# Altium PCB PCB_v1.PcbDoc (part 1 of 2)
Units mil, origin at the board's own origin, x right, y up, seen from the top; angles counter-clockwise.
Board outline 3011.81 x 2441 mil, 3 copper layers (Top Layer, Internal Plane 13, Bottom Layer); 107 components, 61 nets, 342 pads, 602 vias.
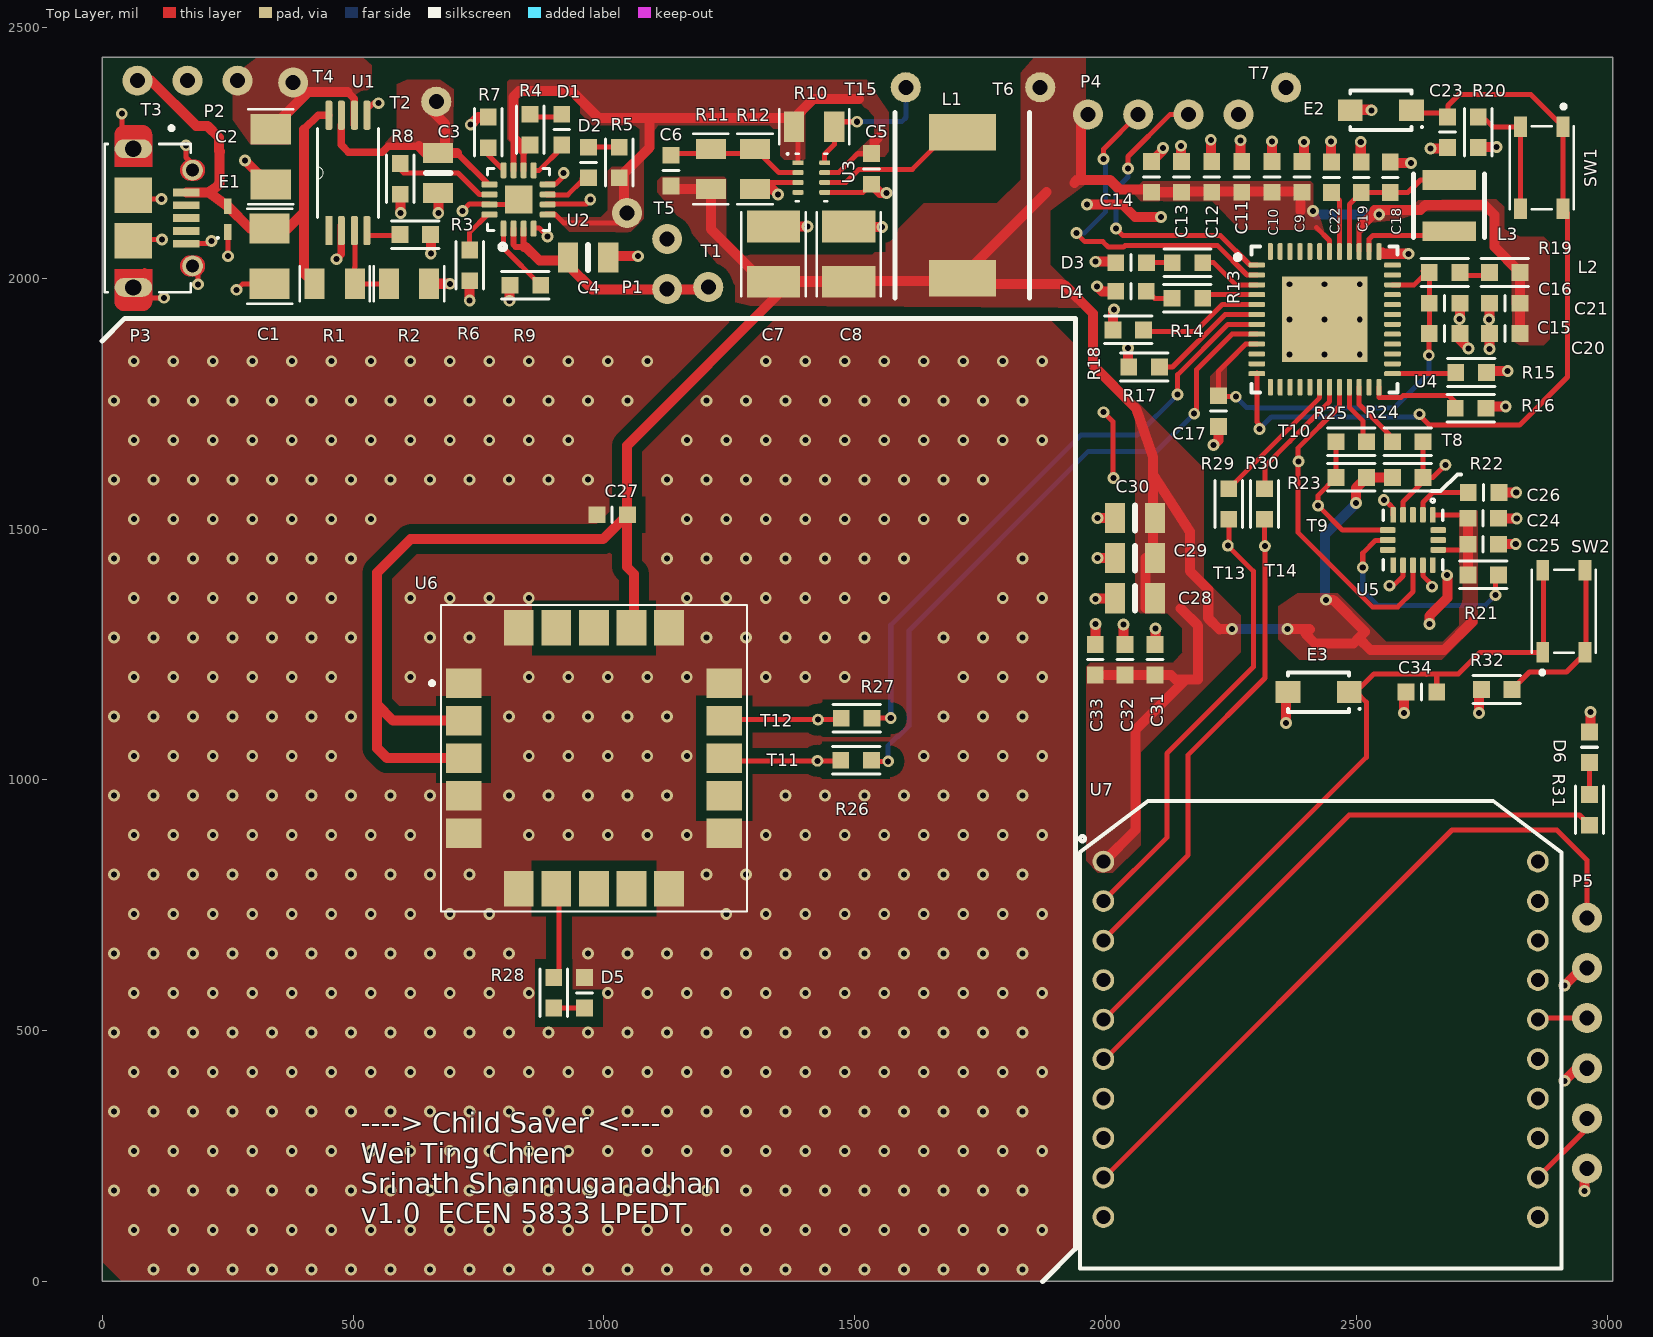
[diagram p0: Top Layer view]
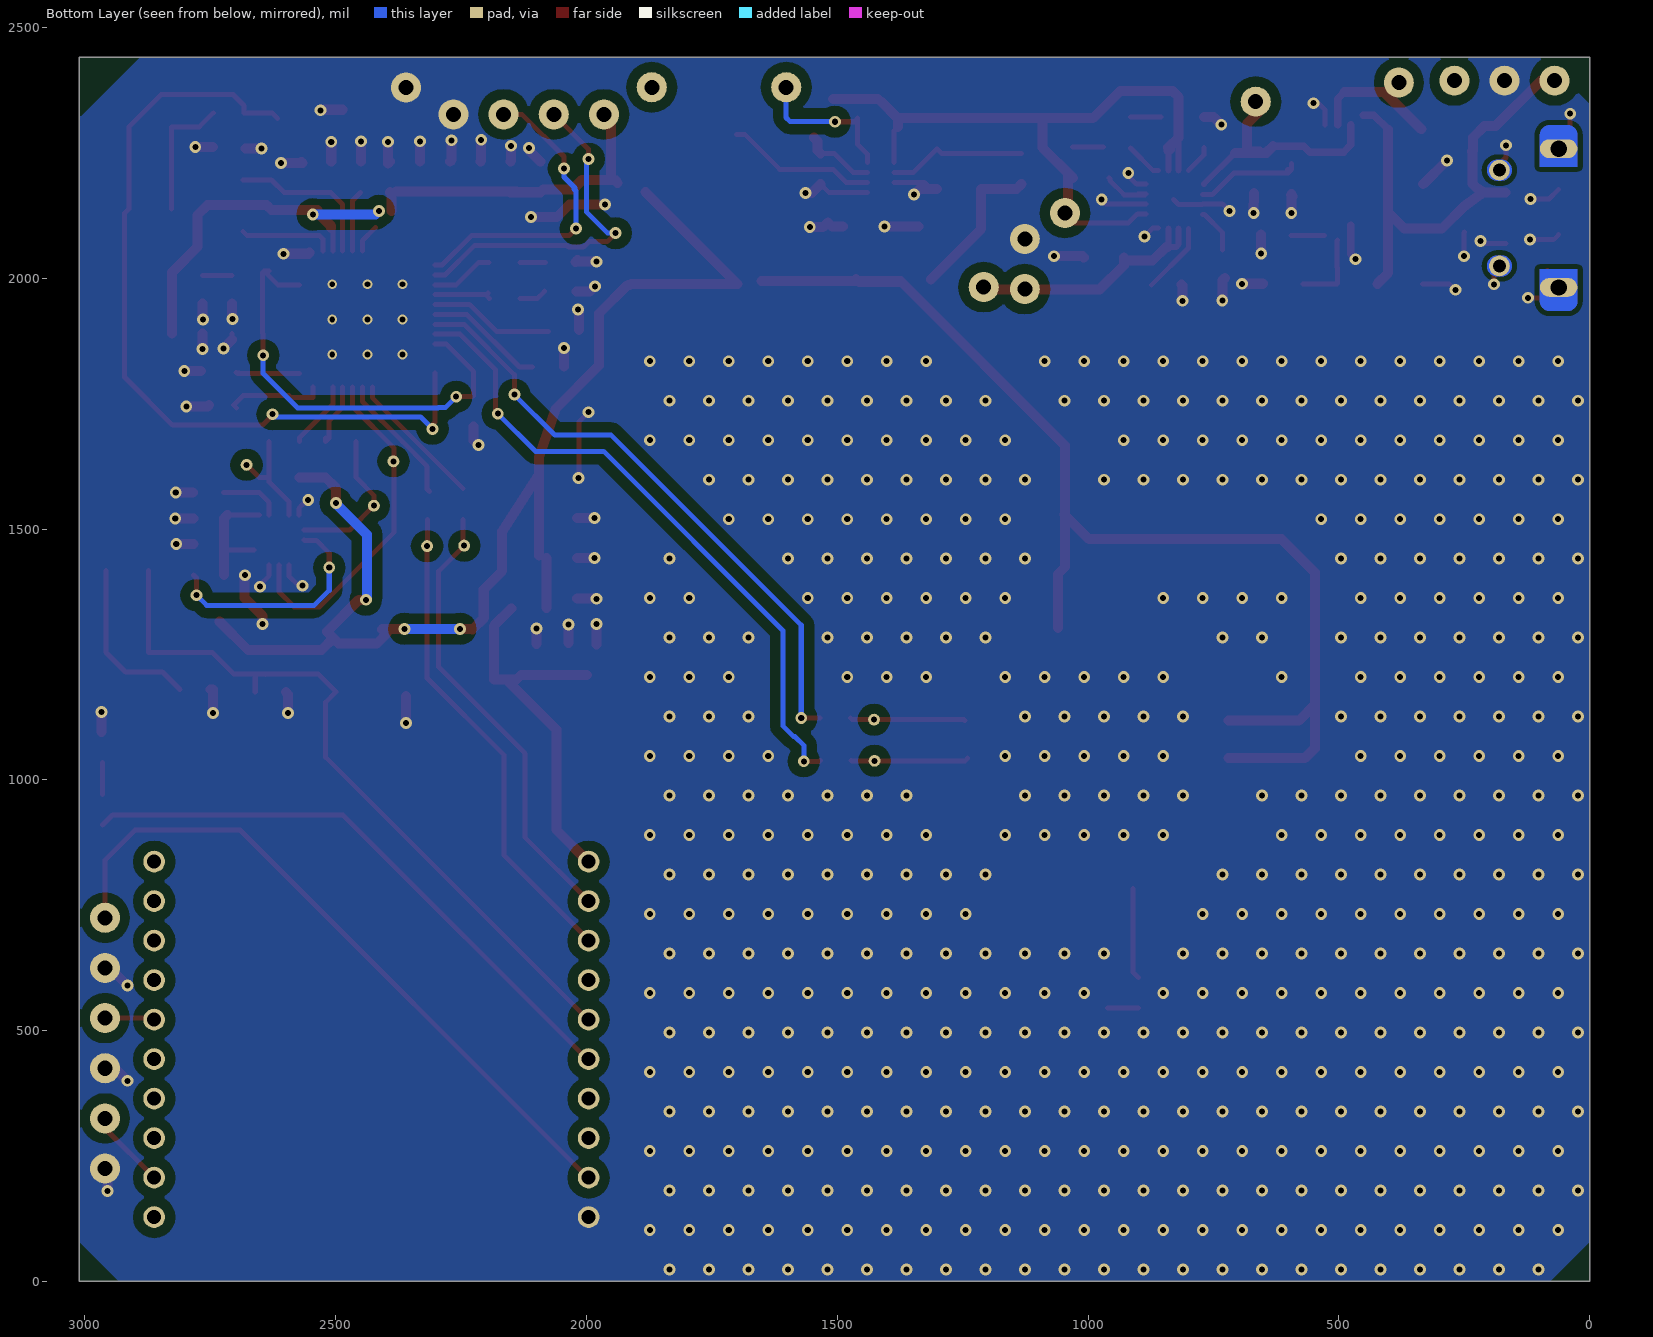
[diagram p1: Bottom Layer view, seen from below]
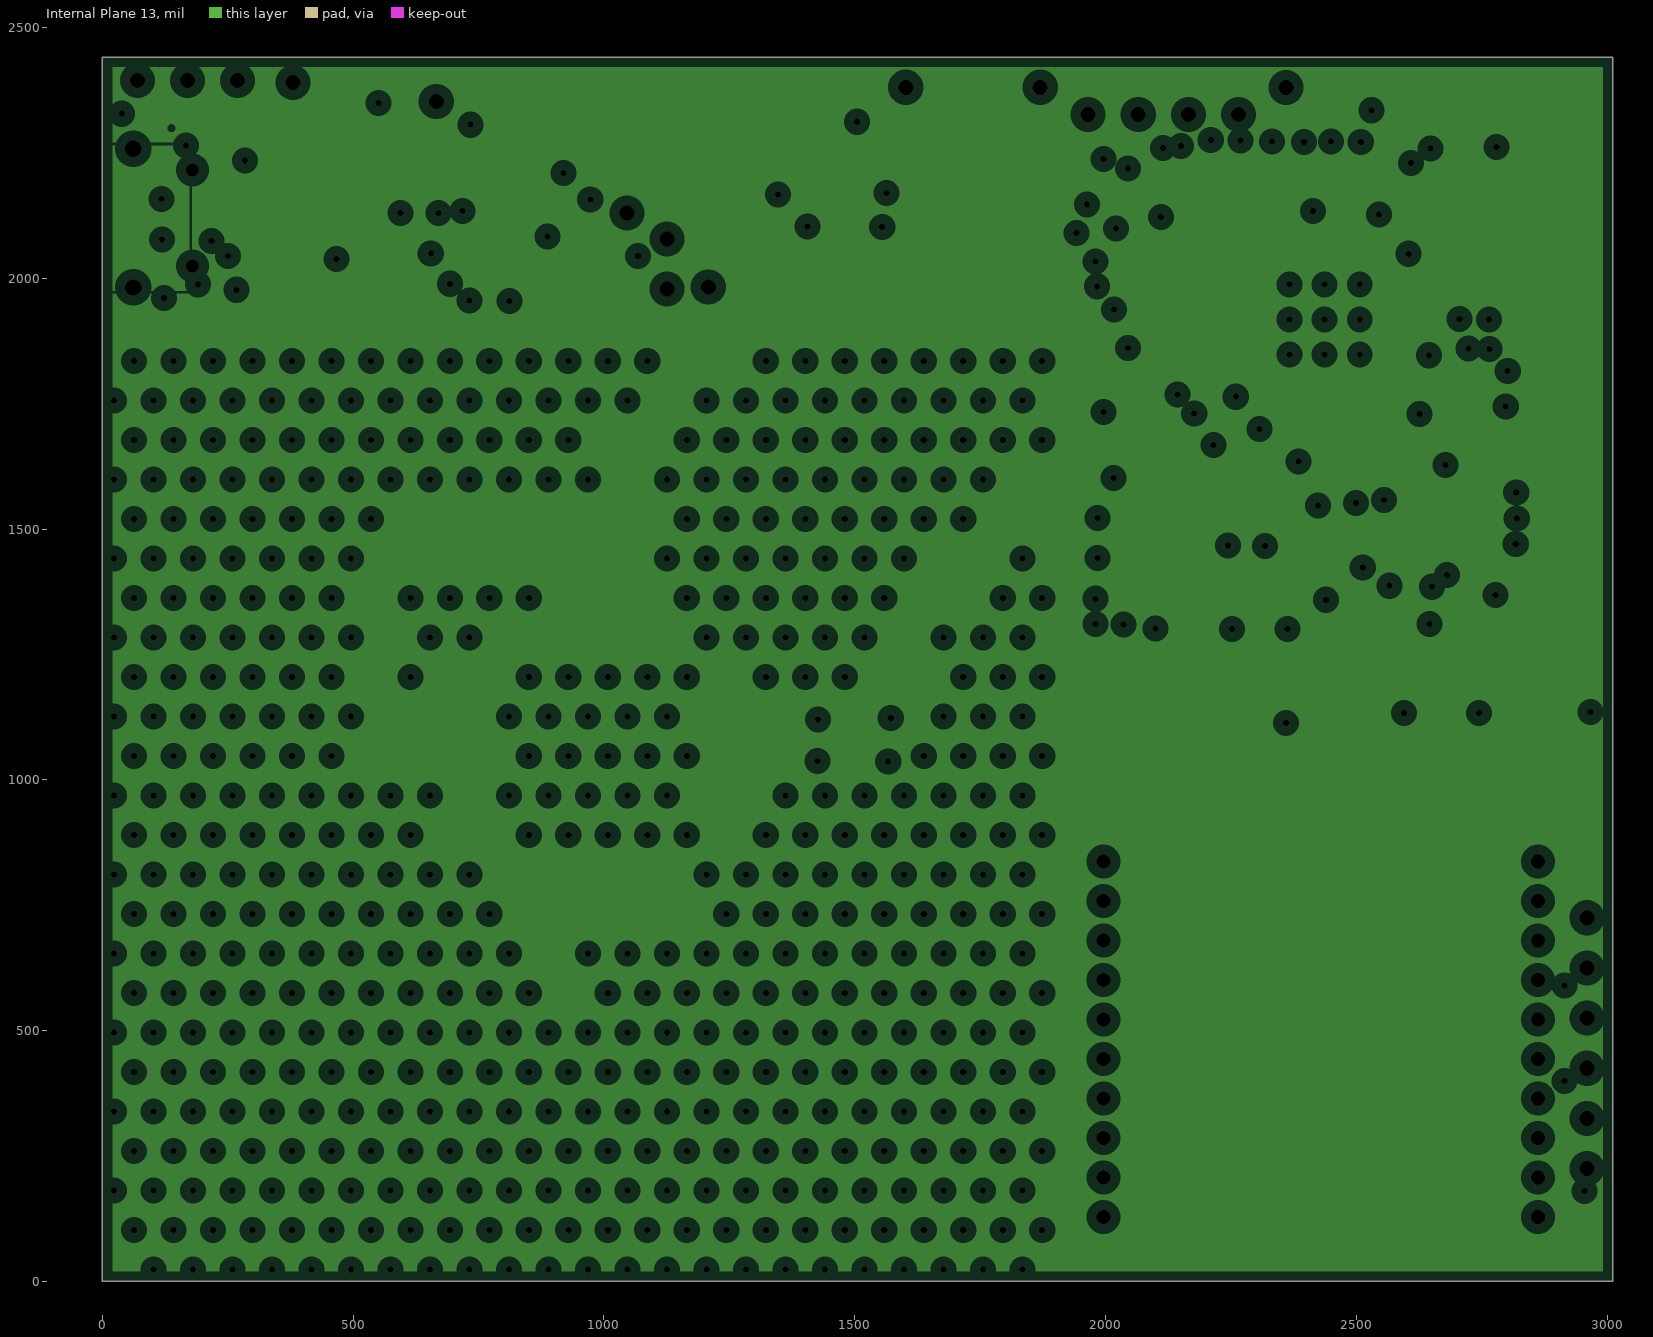
[diagram p2: Internal Plane 13, clearances drawn from the general rule]
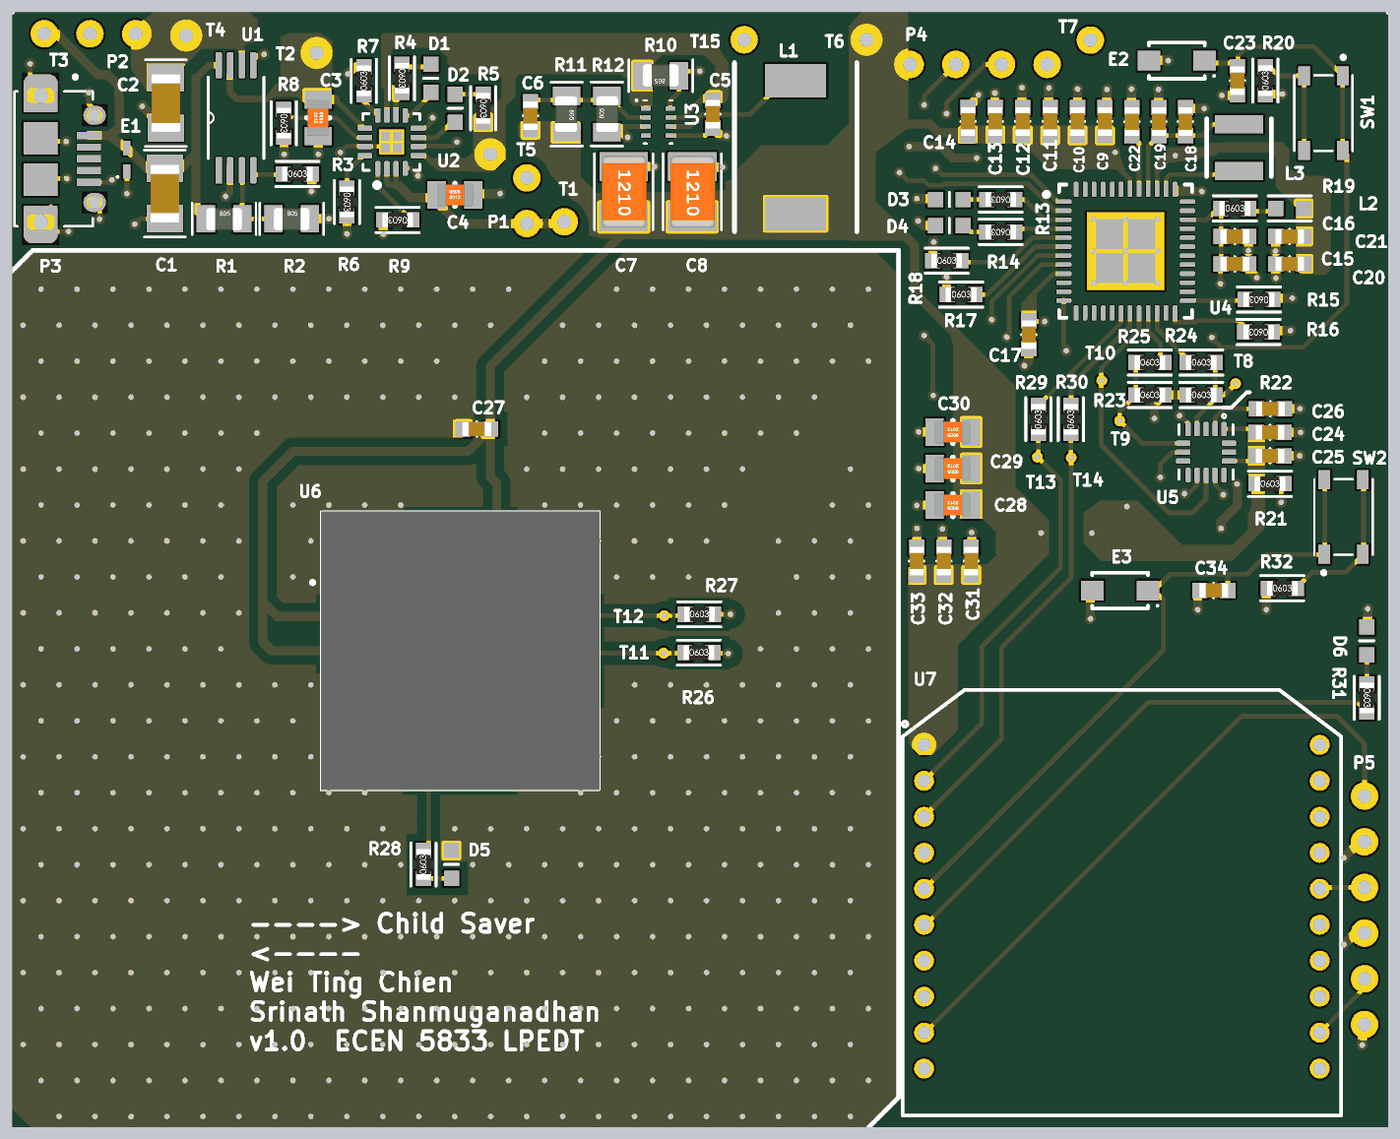
[diagram p4: 3D render of the assembled board from above, using the file's embedded part models]

## Layer stack, top to bottom
Top Solder: solder mask 0.4, Solder Resist, Dk 3.5
Top Layer: signal copper 1.4
Dielectric 1: dielectric 12.6, FR-4, Dk 4.8
Internal Plane 13: plane copper 1.4
Dielectric2: dielectric 12.6, FR-4, Dk 4.8
Bottom Layer: signal copper 1.4
Bottom Solder: solder mask 0.4, Solder Resist, Dk 3.5

## Board outline
0,0 3011.81,0 3011.81,2441 0,2441

## Design rules (kind name [scope] priority, off if disabled: settings)
Clearance [All] p1: gap=10 ignorepadtopadclearanceinfootprint=FALSE except(0: Arc-Hole Track-Hole SMDPad-Hole THPad-Hole Via-Hole Fill-Hole Poly-Hole Region-Hole Text-Hole; 6: Track-Track Track-SMDPad SMDPad-SMDPad; 7: Arc-Text Track-Text SMDPad-Text THPad-Text Via-Text Fill-Text Poly-Text Region-Text Text-Text; 8: Arc-SMDPad; 20: Arc-Via Arc-Poly Track-Via Track-Poly SMDPad-Poly THPad-Via THPad-Poly Via-Via Via-Poly Fill-Poly Poly-Poly)
MinimumSolderMaskSliver [All] p1: minsoldermaskwidth=4
PlaneClearance [All] p1: clearance=20
PlaneConnect [All] p1: planeconnectstyle=Direct reliefexpansion=20 reliefentries=4 reliefconductorwidth=10 reliefairgap=10
PolygonConnect [All] p1: connectstyle=Direct reliefconductorwidth=10 reliefentries=4 polygonreliefangle="90 Angle" airgapwidth=10
RoutingVias [All] p1: holewidth=11.81 width=23.62 viastyle="Through Hole" minholewidth=11.81 minwidth=23.62 maxholewidth=19.68 maxwidth=78.74
SilkToSolderMaskClearance [IsPad] p1: minsilkscreentomaskgap=6 clearancetoexposedcopper=TRUE
SolderMaskExpansion [All] p1: expansion=5
Width POW_Width [(InNet('3.3V') OR InNet('GND') OR InNet('V_USB') OR InNet('V_SOLAR') OR InNet('V_PMU') OR InNet('V_BUCK_IN') OR InNet('V_BAT'))] p1: maxlimit=20 minlimit=6 preferedwidth=20
Width [All] p2: maxlimit=12 minlimit=8 preferedwidth=10
26 further rules are at their usual default settings.

## Classes and differential pairs
component class MCU: C9 C10 C11 C12 C13 C14 C15 C16 C17 C18 C19 C20 C21 C22 C23 D3 D4 E2 L2 L3 P4 R13 R14 R15 R16 R17 R18 R19 R20 SW1 U4
component class "LTE module": C28 C29 C30 C31 C32 C33 C34 D6 E3 P5 R29 R30 R31 R32 SW2 T13 T14 U7
component class "GPS module": C27 D5 R26 R27 R28 T11 T12 U6
component class Accelerometer: C24 C25 C26 R21 R22 R23 R24 R25 T8 T9 T10 U5
component class "Power circuit": C1 C2 C3 C4 C5 C6 C7 C8 D1 D2 E1 L1 P1 P2 P3 R1 R2 R3 R4 R5 R6 R7 R8 R9 R10 R11 R12 T1 T2 T3 T4 T5 T6 T7 T15 U1 U2 U3

## Components (designator, comment, footprint, x,y, rotation, side; value= is the part's Value field where it differs from the comment)
C1 "1206C 100NF" 1206-CAP 333.82,2044 r180 top value=100nF
C2 "1206C 100NF" 1206-CAP 335.95,2242.09 r180 top value=100nF
C3 "0805C 10UF" 0805-CAP 669.61,2210 r180 top value=10uF
C4 "0805C 10UF" 0805-CAP 968.83,2041.31 r270 top value=10uF
C5 "0603C 4U7F" 0603-CAP 1533.39,2218 r180 top value=4.7uF
C6 "0603C 120PF" 0603-CAP 1134.18,2214.54 r0 top value=120pF
C7 "1210C 22UF" 1210-CAP 1338.42,2048 r270 top value=22uF
C8 "1210C 22UF" 1210-CAP 1488.42,2048 r270 top value=22uF
C9 "0603C 10UF" 0603-CAP 2391.85,2201.97 r180 top value=10uF
C10 "0603C 1UF" 0603-CAP 2331.85,2201.97 r180 top value=1uF
C11 "0603C 10NF" 0603-CAP 2271.85,2201.97 r180 top value=10nF
C12 "0603C 10NF" 0603-CAP 2211.85,2201.97 r180 top value=10nF
C13 "0603C 10NF" 0603-CAP 2151.85,2201.97 r180 top value=10nF
C14 "0603C 10NF" 0603-CAP 2091.85,2201.97 r180 top value=10nF
C15 "0603C 10UF" 0603-CAP 2676.1,1890.12 r90 top value=10uF
C16 "0603C 10NF" 0603-CAP 2676.1,1950.12 r90 top value=10nF
C17 "0603C 10NF" 0603-CAP 2225.16,1735.24 r0 top value=10nF
C18 "0603C 100NF" 0603-CAP 2567.91,2201.34 r180 top value=100nF
C19 "0603C 4U7F" 0603-CAP 2509.84,2201.34 r180 top value=4.7uF
C20 "0603C 1UF" 0603-CAP 2796.1,1890.12 r270 top value=1uF
C21 "0603C 10UF" 0603-CAP 2796.1,1950.12 r270 top value=10uF
C22 "0603C 1UF" 0603-CAP 2450.79,2201.34 r180 top value=1uF
C23 "0603C 100NF" 0603-CAP 2681.79,2291.21 r0 top value=100nF
C24 "0603C 100NF" 0603-CAP 2753.15,1521.36 r90 top value=100nF
C25 "0603C 4U7F" 0603-CAP 2753.15,1469.89 r90 top value=4.7uF
C26 "0603C 100NF" 0603-CAP 2753.94,1572.83 r90 top value=100nF
C27 "0603C 4U7F" 0603-CAP 1016.73,1528.54 r270 top value=4.7uF
C28 "47uF" 0805-CAP 2059,1362 r90 top
C29 "47uF" 0805-CAP 2059,1442 r90 top
C30 "47uF" 0805-CAP 2059,1522 r90 top
C31 "0603C 10UF" 0603-CAP 2099.06,1239.52 r180 top value=10uF
C32 "0603C 10NF" 0603-CAP 2039.06,1239.52 r180 top value=10nF
C33 "0603C 68PF" 0603-CAP 1979.56,1239.52 r180 top value=68pF
C34 "0603C 100NF" 0603-CAP 2630,1175 r270 top value=100nF
D1 "LEDR" 0603-LED 915.98,2296.25 r0 top
D2 "LEDG" 0603-LED 969.46,2230.76 r0 top
D3 "0603 LEDG" 0603-LED 2051.15,2031.09 r270 top value=LEDG
D4 "LEDR" 0603-LED 2051,1974 r270 top
D5 "0603 LEDG" 0603-LED 961.3,575.4 r180 top value=LEDG
D6 "0603 LEDG" 0603-LED 2965,1065 r180 top value=LEDG
E1 "ESD_USB" ESD_USB 250.21,2118 r90 top
E2 "ESD_RS" ESD_RS 2549.12,2334.9 r180 top
E3 "ESD_RS" ESD_RS 2425,1175 r180 top
L1 "Inductor 470NH" "Inductor 470NH" 1714.77,2145.67 r270 top value=470nH
L2 "Ferrite Bead" 0603-FerritBead 2796.26,2011.42 r270 top value="1kR 200mA"
L3 "Inductor 4U7H" "Inductor 4U7H" 2685.29,2144.69 r90 top value=4.7uH
P1 "2pins_connector" 2_PINS_2.54 1186.31,1648.32 r90 top
P2 "2pins_connector" 2_PINS_2.54 600,2453.89 r180 top
P3 "ZX62D-B-5P8" *HRS_ZX62D-B-5P8_ZX62D-B-5P8(PRIMARY) 65,2120 r270 top value="MicroUSB Connector"
P4 "SWO" 4_PINS_2.54 1635.35,2266.77 r0 top
P5 "6pins_connector" 6_PINS_2.54 2735,1080 r270 top
R1 "0805R 5K1R" 0805-RES 463.53,1988.98 r270 top value=5.1k
R2 "0805R 5K1R" 0805-RES 611.54,1988.98 r270 top value=5.1k
R3 "0603R 1KR" 0603-RES 624,2087 r270 top value=1kR
R4 "0603R 1K5R" 0603-RES 853,2296.25 r180 top value=1.5k
R5 "0603R 1K5R" 0603-RES 1030.76,2230.76 r180 top value=1.5k
R6 "0603R 1KR" 0603-RES 732.61,2025.56 r180 top value=1k
R7 "0603R 1K07R" 0603-RES 769.46,2290.76 r0 top value=1.07k
R8 "0603R 46K4R" 0603-RES 594.26,2198 r180 top value=46.4k
R9 "0603R 10KR" 0603-RES 843.57,1986.19 r90 top value=10k
R10 "0805R 100KR" 0805-RES 1419.41,2301.96 r90 top value=100k
R11 "0805R 453KR" 0805-RES 1213.39,2218 r180 top value=453k
R12 "0805R 100KR" 0805-RES 1301.4,2218 r0 top value=100k
R13 "3KR" 0603-RES 2163.65,2031.09 r90 top value=3k
R14 "3KR" 0603-RES 2163.5,1959.97 r90 top value=3k
R15 "0603R NC" 0603-RES 2729,1812.13 r90 top value=NC
R16 "0603R NC" 0603-RES 2728,1741 r90 top value=NC
R17 "0603R NC" 0603-RES 2077,1822.97 r270 top value=NC
R18 "0603R NC" 0603-RES 2045.49,1897 r270 top value=NC
R19 "0603R 1R" 0603-RES 2676.18,2011.42 r270 top value=1
R20 "0603R 100R" 0603-RES 2743.09,2291.21 r0 top value=100R
R21 "0603R 10KR" 0603-RES 2753.15,1408.58 r270 top value=10k
R22 "0603R 10KR" 0603-RES 2602.64,1602.97 r270 top value=10k
R23 "0603R 10KR" 0603-RES 2490.14,1602.97 r270 top value=10k
R24 "0603R 1R" 0603-RES 2602.64,1674.09 r270 top value=1
R25 "0603R 1R" 0603-RES 2490.14,1674.09 r270 top value=1
R26 "0603R 47R" 0603-RES 1503,1039 r270 top value=47
R27 "0603R 47R" 0603-RES 1504.02,1123 r270 top value=47
R28 "0603R 1K5R" 0603-RES 900,575.4 r0 top value=1.5k
R29 "0603R 1R" 0603-RES 2246,1550 r0 top value=1
R30 "0603R 1R" 0603-RES 2317.13,1550 r0 top value=1
R31 "0603R 1K5R" 0603-RES 2965,940 r180 top value=1.5k
R32 "0603R 100R" 0603-RES 2780,1180 r270 top value=100R
SW1 "PTS810" *SW_PTS810_SJM_250_SMTR_LFS 2870.08,2220.19 r270 top
SW2 "PTS810" *SW_PTS810_SJM_250_SMTR_LFS 2914.07,1336 r90 top
T1 "1pin_header" 1_PIN_2.54 878.25,1922.25 r0 top
T2 "1pin_header" 1_PIN_2.54 726,2022 r90 top
T3 "1pin_header" 1_PIN_2.54 130,2063.89 r90 top
T4 "1pin_header" 1_PIN_2.54 440.68,2060 r90 top
T5 "1pin_header" 1_PIN_2.54 716.3,2070 r0 top
T6 "1pin_header" 1_PIN_2.54 1540,2320.72 r0 top
T7 "1pin_header" 1_PIN_2.54 2420,2050 r90 top
T8 "1pin_test" 1_PIN_test 2617.89,1958 r270 top
T9 "1pin_test" 1_PIN_test 2364,1876.59 r270 top
T10 "1pin_test" 1_PIN_test 2325,1965 r270 top
T11 "" 1_PIN_test 1095.93,978 r0 top
T12 "" 1_PIN_test 1486.96,790 r90 top
T13 "" 1_PIN_test 2304,1137 r90 top
T14 "" 1_PIN_test 2378,1136 r90 top
T15 "" 1_PIN_2.54 1662,2050.72 r90 top
U1 "TPS2111APW" *SOP65P640X120-8N 489.69,2210 r90 top
U2 "BQ24079TRGTR" *QFN50P300X300X100-17N 830,2157 r90 top
U3 "TPS62822" SON50P150X100_HS-9N 1413.71,2200.79 r0 top
U4 "EFM32PG12_power" QFN50P700X700X90_HS-49N_ 2437.01,1918 r0 top
U5 "MMA8452Q" *QFN-16_0.5MM 2613.15,1478.12 r270 top
U6 "SAM-M8Q-0-10" SAMM8Q010 980.32,1043.11 r0 top
U7 "XB3-C-A1-UT-001" XB24CAPIT-001 2428.99,857.73 r0 top

## Footprints (in the part's own frame and the unit in brackets; to place one, negate y for a bottom-side part, rotate by r counter-clockwise, add the part's x,y. Pads: shape width x height; smd on the part's side, far side on the other; paste and mask are expansions set on the pad)
1_PIN_2.54 [mil]
  round 60 hole 30: 1(330,60)
1_PIN_test [mm]
  round 0.6 hole 0.3: 1(8.382,1.524)
2_PINS_2.54 [mil]
  round 60 hole 30: 1(330,60) 2(430,60)
4_PINS_2.54 [mil]
  round 60 hole 30: 1(330,60) 2(430,60) 3(530,60) 4(630,60)
6_PINS_2.54 [mil]
  round 60 hole 30: 1(355,225) 2(455,225) 3(555,225) 4(655,225) 5(755,225) 6(855,225)
0603-CAP [mm]
  rect 0.85x0.85 smd: 1(0,0.775) 2(0,-0.775)
  silkscreen extent -0.4,0 0.4,0, body extent -0.4,-0.8 0.4,0.8, height 0.9
0603-FerritBead [mm]
  rect 0.85x0.85 smd: 1(0,0.775) 2(0,-0.775)
  silkscreen extent -0.7,-1.2 0.7,1.2, body extent -0.4,-0.85 0.4,0.85, height 1
0603-LED [mm]
  rect 0.85x0.85 smd: 1(0,0.775) 2(0,-0.775)
  silkscreen extent -0.4,0 0.4,0, body extent -0.4,-0.8 0.4,0.8, height 1.1
0603-RES [mm]
  rect 0.85x0.85 smd: 1(0,0.775) 2(0,-0.775)
  silkscreen extent -0.7,-1.2 0.7,1.2, body extent -0.4,-0.85 0.4,0.85, height 0.56
0805-CAP [mil]
  rect 60x40 smd: 1(0,40) 2(0,-40)
  silkscreen extent -25,0 25,0, body extent -25,-39 25,39, height 35
0805-RES [mil]
  rect 60x40 smd: 1(0,40) 2(0,-40)
  silkscreen extent -35,-70 35,70, body extent -24,-39 26,39, height 31
1206-CAP [mil]
  rect 80x60 smd mask+2: 1(0,55) 2(0,-55)
  silkscreen extent -45,-95 45,95, body extent -31,-63 32,63, height 39
1210-CAP [mm]
  rect 1.6x2.7 smd: 1(-1.4,0) 2(1.4,0)
  silkscreen extent -2.12,-1.63 2.12,1.63, body extent -2,-1.22 2,1.27, height 1.7
*HRS_ZX62D-B-5P8_ZX62D-B-5P8(PRIMARY) [mm]
  rect 0.4x1.35 smd mask+0.051: 1(-1.3,2.6) 2(-0.65,2.6) 3(0,2.6) 4(0.65,2.6) 5(1.3,2.6)
  round 1.05 hole 0.65: S1(-2.425,2.925) S2(2.425,2.925)
  oval 0.95x1.9 hole 0.825: S3(-3.512,-0.075) S6(3.512,-0.075)
  rect 1.8x1.9 smd: S4(-1.15,-0.075) S5(1.15,-0.075)
  Top Layer region: 3.1,-0.075 2.6,-0.075 2.6,0.875 4.2,0.875 4.226,0.874 4.252,0.872 4.278,0.869 4.304,0.864 4.329,0.858 4.355,0.851 4.379,0.842 4.403,0.832 4.427,0.821 4.45,0.808 4.472,0.794 4.494,0.78 4.515,0.764 4.535,0.747 4.554,0.729 4.572,0.71 4.589,0.69 4.605,0.669 4.619,0.647 4.633,0.625 4.645,0.602 4.657,0.578 4.667,0.554 4.676,0.53 4.683,0.504 4.689,0.479 4.694,0.453 4.697,0.427 4.699,0.401 4.7,0.375 4.7,-0.075 3.925,-0.075 3.925,0.4 3.925,0.414 3.923,0.429 3.922,0.443 3.919,0.457 3.916,0.471 3.912,0.485 3.907,0.499 3.901,0.512 3.895,0.525 3.888,0.537 3.881,0.55 3.872,0.562 3.864,0.573 3.854,0.584 3.844,0.594 3.834,0.604 3.823,0.614 3.812,0.622 3.8,0.631 3.788,0.638 3.775,0.645 3.762,0.651 3.749,0.657 3.735,0.662 3.721,0.666 3.707,0.669 3.693,0.672 3.679,0.673 3.664,0.675 3.65,0.675 3.4,0.675 3.384,0.675 3.369,0.673 3.353,0.671 3.338,0.668 3.322,0.665 3.307,0.66 3.292,0.655 3.278,0.649 3.264,0.642 3.25,0.635 3.237,0.627 3.224,0.618 3.211,0.608 3.199,0.598 3.188,0.587 3.177,0.576 3.167,0.564 3.157,0.551 3.148,0.538 3.14,0.525 3.133,0.511 3.126,0.497 3.12,0.483 3.115,0.468 3.11,0.453 3.107,0.437 3.104,0.422 3.102,0.406 3.1,0.391 3.1,0.375 3.1,-0.075
  Top Layer region: -3.1,-0.075 -2.6,-0.075 -2.6,-1.025 -4.2,-1.025 -4.226,-1.024 -4.252,-1.022 -4.278,-1.019 -4.304,-1.014 -4.329,-1.008 -4.355,-1.001 -4.379,-0.992 -4.403,-0.982 -4.427,-0.971 -4.45,-0.958 -4.472,-0.944 -4.494,-0.93 -4.515,-0.914 -4.535,-0.897 -4.554,-0.879 -4.572,-0.86 -4.589,-0.84 -4.605,-0.819 -4.619,-0.797 -4.633,-0.775 -4.645,-0.752 -4.657,-0.728 -4.667,-0.704 -4.676,-0.68 -4.683,-0.654 -4.689,-0.629 -4.694,-0.603 -4.697,-0.577 -4.699,-0.551 -4.7,-0.525 -4.7,-0.075 -3.925,-0.075 -3.925,-0.55 -3.925,-0.564 -3.923,-0.579 -3.922,-0.593 -3.919,-0.607 -3.916,-0.621 -3.912,-0.635 -3.907,-0.649 -3.901,-0.662 -3.895,-0.675 -3.888,-0.687 -3.881,-0.7 -3.872,-0.712 -3.864,-0.723 -3.854,-0.734 -3.844,-0.744 -3.834,-0.754 -3.823,-0.764 -3.812,-0.772 -3.8,-0.781 -3.788,-0.788 -3.775,-0.795 -3.762,-0.801 -3.749,-0.807 -3.735,-0.812 -3.721,-0.816 -3.707,-0.819 -3.693,-0.822 -3.679,-0.823 -3.664,-0.825 -3.65,-0.825 -3.4,-0.825 -3.384,-0.825 -3.369,-0.823 -3.353,-0.821 -3.338,-0.818 -3.322,-0.815 -3.307,-0.81 -3.292,-0.805 -3.278,-0.799 -3.264,-0.792 -3.25,-0.785 -3.237,-0.777 -3.224,-0.768 -3.211,-0.758 -3.199,-0.748 -3.188,-0.737 -3.177,-0.726 -3.167,-0.714 -3.157,-0.701 -3.148,-0.688 -3.14,-0.675 -3.133,-0.661 -3.126,-0.647 -3.12,-0.633 -3.115,-0.618 -3.11,-0.603 -3.107,-0.587 -3.104,-0.572 -3.102,-0.556 -3.1,-0.541 -3.1,-0.525 -3.1,-0.075
  Top Layer region: 2.6,-1.025 4.2,-1.025 4.226,-1.024 4.252,-1.022 4.278,-1.019 4.304,-1.014 4.329,-1.008 4.355,-1.001 4.379,-0.992 4.403,-0.982 4.427,-0.971 4.45,-0.958 4.472,-0.944 4.494,-0.93 4.515,-0.914 4.535,-0.897 4.554,-0.879 4.572,-0.86 4.589,-0.84 4.605,-0.819 4.619,-0.797 4.633,-0.775 4.645,-0.752 4.657,-0.728 4.667,-0.704 4.676,-0.68 4.683,-0.654 4.689,-0.629 4.694,-0.603 4.697,-0.577 4.699,-0.551 4.7,-0.525 4.7,-0.075 3.925,-0.075 3.925,-0.525 3.925,-0.541 3.923,-0.556 3.921,-0.572 3.918,-0.587 3.915,-0.603 3.91,-0.618 3.905,-0.633 3.899,-0.647 3.892,-0.661 3.885,-0.675 3.877,-0.688 3.868,-0.701 3.858,-0.714 3.848,-0.726 3.837,-0.737 3.826,-0.748 3.814,-0.758 3.801,-0.768 3.788,-0.777 3.775,-0.785 3.761,-0.792 3.747,-0.799 3.733,-0.805 3.718,-0.81 3.703,-0.815 3.687,-0.818 3.672,-0.821 3.656,-0.823 3.641,-0.825 3.625,-0.825 3.4,-0.825 3.384,-0.825 3.369,-0.823 3.353,-0.821 3.338,-0.818 3.322,-0.815 3.307,-0.81 3.292,-0.805 3.278,-0.799 3.264,-0.792 3.25,-0.785 3.237,-0.777 3.224,-0.768 3.211,-0.758 3.199,-0.748 3.188,-0.737 3.177,-0.726 3.167,-0.714 3.157,-0.701 3.148,-0.688 3.14,-0.675 3.133,-0.661 3.126,-0.647 3.12,-0.633 3.115,-0.618 3.11,-0.603 3.107,-0.587 3.104,-0.572 3.102,-0.556 3.1,-0.541 3.1,-0.525 3.1,-0.075 2.6,-0.075 2.6,-1.025
  Top Layer region: -2.6,0.875 -4.2,0.875 -4.226,0.874 -4.252,0.872 -4.278,0.869 -4.304,0.864 -4.329,0.858 -4.355,0.851 -4.379,0.842 -4.403,0.832 -4.427,0.821 -4.45,0.808 -4.472,0.794 -4.494,0.78 -4.515,0.764 -4.535,0.747 -4.554,0.729 -4.572,0.71 -4.589,0.69 -4.605,0.669 -4.619,0.647 -4.633,0.625 -4.645,0.602 -4.657,0.578 -4.667,0.554 -4.676,0.53 -4.683,0.504 -4.689,0.479 -4.694,0.453 -4.697,0.427 -4.699,0.401 -4.7,0.375 -4.7,-0.075 -3.925,-0.075 -3.925,0.375 -3.925,0.391 -3.923,0.406 -3.921,0.422 -3.918,0.437 -3.915,0.453 -3.91,0.468 -3.905,0.483 -3.899,0.497 -3.892,0.511 -3.885,0.525 -3.877,0.538 -3.868,0.551 -3.858,0.564 -3.848,0.576 -3.837,0.587 -3.826,0.598 -3.814,0.608 -3.801,0.618 -3.788,0.627 -3.775,0.635 -3.761,0.642 -3.747,0.649 -3.733,0.655 -3.718,0.66 -3.703,0.665 -3.687,0.668 -3.672,0.671 -3.656,0.673 -3.641,0.675 -3.625,0.675 -3.4,0.675 -3.384,0.675 -3.369,0.673 -3.353,0.671 -3.338,0.668 -3.322,0.665 -3.307,0.66 -3.292,0.655 -3.278,0.649 -3.264,0.642 -3.25,0.635 -3.237,0.627 -3.224,0.618 -3.211,0.608 -3.199,0.598 -3.188,0.587 -3.177,0.576 -3.167,0.564 -3.157,0.551 -3.148,0.538 -3.14,0.525 -3.133,0.511 -3.126,0.497 -3.12,0.483 -3.115,0.468 -3.11,0.453 -3.107,0.437 -3.104,0.422 -3.102,0.406 -3.1,0.391 -3.1,0.375 -3.1,-0.075 -2.6,-0.075 -2.6,0.875
  Top Layer region: 2.425,2.5 2.425,2.3 2.398,2.301 2.37,2.303 2.343,2.306 2.316,2.311 2.289,2.318 2.263,2.326 2.237,2.335 2.211,2.345 2.187,2.357 2.163,2.37 2.139,2.385 2.116,2.4 2.095,2.417 2.074,2.435 2.054,2.454 2.035,2.474 2.017,2.495 2,2.516 1.985,2.539 1.97,2.562 1.957,2.587 1.945,2.611 1.935,2.637 1.926,2.663 1.918,2.689 1.911,2.716 1.906,2.743 1.903,2.77 1.901,2.798 1.9,2.825 1.9,3.025 1.901,3.052 1.903,3.08 1.906,3.107 1.911,3.134 1.918,3.161 1.926,3.187 1.935,3.213 1.945,3.239 1.957,3.263 1.97,3.287 1.985,3.311 2,3.334 2.017,3.355 2.035,3.376 2.054,3.396 2.074,3.415 2.095,3.433 2.116,3.45 2.139,3.465 2.163,3.48 2.187,3.493 2.211,3.505 2.237,3.515 2.263,3.524 2.289,3.532 2.316,3.539 2.343,3.544 2.37,3.547 2.398,3.549 2.425,3.55 2.425,3.35 2.408,3.35 2.391,3.348 2.374,3.346 2.357,3.343 2.341,3.339 2.325,3.334 2.309,3.328 2.293,3.322 2.277,3.315 2.262,3.306 2.248,3.298 2.234,3.288 2.22,3.278 2.208,3.267 2.195,3.255 2.183,3.242 2.172,3.23 2.162,3.216 2.152,3.202 2.144,3.187 2.135,3.173 2.128,3.157 2.122,3.141 2.116,3.125 2.111,3.109 2.107,3.093 2.104,3.076 2.102,3.059 2.1,3.042 2.1,3.025 2.1,2.825 2.1,2.808 2.102,2.791 2.104,2.774 2.107,2.757 2.111,2.741 2.116,2.725 2.122,2.709 2.128,2.693 2.135,2.677 2.144,2.662 2.152,2.648 2.162,2.634 2.172,2.62 2.183,2.608 2.195,2.595 2.208,2.583 2.22,2.572 2.234,2.562 2.248,2.552 2.262,2.544 2.277,2.535 2.293,2.528 2.309,2.522 2.325,2.516 2.341,2.511 2.357,2.507 2.374,2.504 2.391,2.502 2.408,2.5 2.425,2.5
  Top Layer region: 2.425,3.35 2.425,3.55 2.452,3.549 2.48,3.547 2.507,3.544 2.534,3.539 2.561,3.532 2.587,3.524 2.613,3.515 2.639,3.505 2.663,3.493 2.688,3.48 2.711,3.465 2.734,3.45 2.755,3.433 2.776,3.415 2.796,3.396 2.815,3.376 2.833,3.355 2.85,3.334 2.865,3.311 2.88,3.287 2.893,3.263 2.905,3.239 2.915,3.213 2.924,3.187 2.932,3.161 2.939,3.134 2.944,3.107 2.947,3.08 2.949,3.052 2.95,3.025 2.95,2.825 2.949,2.798 2.947,2.77 2.944,2.743 2.939,2.716 2.932,2.689 2.924,2.663 2.915,2.637 2.905,2.611 2.893,2.587 2.88,2.562 2.865,2.539 2.85,2.516 2.833,2.495 2.815,2.474 2.796,2.454 2.776,2.435 2.755,2.417 2.734,2.4 2.711,2.385 2.688,2.37 2.663,2.357 2.639,2.345 2.613,2.335 2.587,2.326 2.561,2.318 2.534,2.311 2.507,2.306 2.48,2.303 2.452,2.301 2.425,2.3 2.425,2.5 2.442,2.5 2.459,2.502 2.476,2.504 2.493,2.507 2.509,2.511 2.525,2.516 2.541,2.522 2.557,2.528 2.573,2.535 2.588,2.544 2.602,2.552 2.616,2.562 2.63,2.572 2.642,2.583 2.655,2.595 2.667,2.608 2.678,2.62 2.688,2.634 2.698,2.648 2.706,2.662 2.715,2.677 2.722,2.693 2.728,2.709 2.734,2.725 2.739,2.741 2.743,2.757 2.746,2.774 2.748,2.791 2.75,2.808 2.75,2.825 2.75,3.025 2.75,3.042 2.748,3.059 2.746,3.076 2.743,3.093 2.739,3.109 2.734,3.125 2.728,3.141 2.722,3.157 2.715,3.173 2.706,3.187 2.698,3.202 2.688,3.216 2.678,3.23 2.667,3.242 2.655,3.255 2.642,3.267 2.63,3.278 2.616,3.288 2.602,3.298 2.588,3.306 2.573,3.315 2.557,3.322 2.541,3.328 2.525,3.334 2.509,3.339 2.493,3.343 2.476,3.346 2.459,3.348 2.442,3.35 2.425,3.35
  Top Layer region: -2.425,2.5 -2.425,2.3 -2.452,2.301 -2.48,2.303 -2.507,2.306 -2.534,2.311 -2.561,2.318 -2.587,2.326 -2.613,2.335 -2.639,2.345 -2.663,2.357 -2.688,2.37 -2.711,2.385 -2.734,2.4 -2.755,2.417 -2.776,2.435 -2.796,2.454 -2.815,2.474 -2.833,2.495 -2.85,2.516 -2.865,2.539 -2.88,2.562 -2.893,2.587 -2.905,2.611 -2.915,2.637 -2.924,2.663 -2.932,2.689 -2.939,2.716 -2.944,2.743 -2.947,2.77 -2.949,2.798 -2.95,2.825 -2.95,3.025 -2.949,3.052 -2.947,3.08 -2.944,3.107 -2.939,3.134 -2.932,3.161 -2.924,3.187 -2.915,3.213 -2.905,3.239 -2.893,3.263 -2.88,3.287 -2.865,3.311 -2.85,3.334 -2.833,3.355 -2.815,3.376 -2.796,3.396 -2.776,3.415 -2.755,3.433 -2.734,3.45 -2.711,3.465 -2.688,3.48 -2.663,3.493 -2.639,3.505 -2.613,3.515 -2.587,3.524 -2.561,3.532 -2.534,3.539 -2.507,3.544 -2.48,3.547 -2.452,3.549 -2.425,3.55 -2.425,3.35 -2.442,3.35 -2.459,3.348 -2.476,3.346 -2.493,3.343 -2.509,3.339 -2.525,3.334 -2.541,3.328 -2.557,3.322 -2.573,3.315 -2.588,3.306 -2.602,3.298 -2.616,3.288 -2.63,3.278 -2.642,3.267 -2.655,3.255 -2.667,3.242 -2.678,3.23 -2.688,3.216 -2.698,3.202 -2.706,3.187 -2.715,3.173 -2.722,3.157 -2.728,3.141 -2.734,3.125 -2.739,3.109 -2.743,3.093 -2.746,3.076 -2.748,3.059 -2.75,3.042 -2.75,3.025 -2.75,2.825 -2.75,2.808 -2.748,2.791 -2.746,2.774 -2.743,2.757 -2.739,2.741 -2.734,2.725 -2.728,2.709 -2.722,2.693 -2.715,2.677 -2.706,2.662 -2.698,2.648 -2.688,2.634 -2.678,2.62 -2.667,2.608 -2.655,2.595 -2.642,2.583 -2.63,2.572 -2.616,2.562 -2.602,2.552 -2.588,2.544 -2.573,2.535 -2.557,2.528 -2.541,2.522 -2.525,2.516 -2.509,2.511 -2.493,2.507 -2.476,2.504 -2.459,2.502 -2.442,2.5 -2.425,2.5
  Top Layer region: -2.425,3.35 -2.425,3.55 -2.398,3.549 -2.37,3.547 -2.343,3.544 -2.316,3.539 -2.289,3.532 -2.263,3.524 -2.237,3.515 -2.211,3.505 -2.187,3.493 -2.163,3.48 -2.139,3.465 -2.116,3.45 -2.095,3.433 -2.074,3.415 -2.054,3.396 -2.035,3.376 -2.017,3.355 -2,3.334 -1.985,3.311 -1.97,3.287 -1.957,3.263 -1.945,3.239 -1.935,3.213 -1.926,3.187 -1.918,3.161 -1.911,3.134 -1.906,3.107 -1.903,3.08 -1.901,3.052 -1.9,3.025 -1.9,2.825 -1.901,2.798 -1.903,2.77 -1.906,2.743 -1.911,2.716 -1.918,2.689 -1.926,2.663 -1.935,2.637 -1.945,2.611 -1.957,2.587 -1.97,2.562 -1.985,2.539 -2,2.516 -2.017,2.495 -2.035,2.474 -2.054,2.454 -2.074,2.435 -2.095,2.417 -2.116,2.4 -2.139,2.385 -2.163,2.37 -2.187,2.357 -2.211,2.345 -2.237,2.335 -2.263,2.326 -2.289,2.318 -2.316,2.311 -2.343,2.306 -2.37,2.303 -2.398,2.301 -2.425,2.3 -2.425,2.5 -2.408,2.5 -2.391,2.502 -2.374,2.504 -2.357,2.507 -2.341,2.511 -2.325,2.516 -2.309,2.522 -2.293,2.528 -2.277,2.535 -2.262,2.544 -2.248,2.552 -2.234,2.562 -2.22,2.572 -2.208,2.583 -2.195,2.595 -2.183,2.608 -2.172,2.62 -2.162,2.634 -2.152,2.648 -2.144,2.662 -2.135,2.677 -2.128,2.693 -2.122,2.709 -2.116,2.725 -2.111,2.741 -2.107,2.757 -2.104,2.774 -2.102,2.791 -2.1,2.808 -2.1,2.825 -2.1,3.025 -2.1,3.042 -2.102,3.059 -2.104,3.076 -2.107,3.093 -2.111,3.109 -2.116,3.125 -2.122,3.141 -2.128,3.157 -2.135,3.173 -2.144,3.187 -2.152,3.202 -2.162,3.216 -2.172,3.23 -2.183,3.242 -2.195,3.255 -2.208,3.267 -2.22,3.278 -2.234,3.288 -2.248,3.298 -2.262,3.306 -2.277,3.315 -2.293,3.322 -2.309,3.328 -2.325,3.334 -2.341,3.339 -2.357,3.343 -2.374,3.346 -2.391,3.348 -2.408,3.35 -2.425,3.35
  Bottom Layer region: 3.1,-0.075 2.6,-0.075 2.6,0.875 4.2,0.875 4.226,0.874 4.252,0.872 4.278,0.869 4.304,0.864 4.329,0.858 4.355,0.851 4.379,0.842 4.403,0.832 4.427,0.821 4.45,0.808 4.472,0.794 4.494,0.78 4.515,0.764 4.535,0.747 4.554,0.729 4.572,0.71 4.589,0.69 4.605,0.669 4.619,0.647 4.633,0.625 4.645,0.602 4.657,0.578 4.667,0.554 4.676,0.53 4.683,0.504 4.689,0.479 4.694,0.453 4.697,0.427 4.699,0.401 4.7,0.375 4.7,-0.075 3.925,-0.075 3.925,0.4 3.925,0.414 3.923,0.429 3.922,0.443 3.919,0.457 3.916,0.471 3.912,0.485 3.907,0.499 3.901,0.512 3.895,0.525 3.888,0.537 3.881,0.55 3.872,0.562 3.864,0.573 3.854,0.584 3.844,0.594 3.834,0.604 3.823,0.614 3.812,0.622 3.8,0.631 3.788,0.638 3.775,0.645 3.762,0.651 3.749,0.657 3.735,0.662 3.721,0.666 3.707,0.669 3.693,0.672 3.679,0.673 3.664,0.675 3.65,0.675 3.4,0.675 3.384,0.675 3.369,0.673 3.353,0.671 3.338,0.668 3.322,0.665 3.307,0.66 3.292,0.655 3.278,0.649 3.264,0.642 3.25,0.635 3.237,0.627 3.224,0.618 3.211,0.608 3.199,0.598 3.188,0.587 3.177,0.576 3.167,0.564 3.157,0.551 3.148,0.538 3.14,0.525 3.133,0.511 3.126,0.497 3.12,0.483 3.115,0.468 3.11,0.453 3.107,0.437 3.104,0.422 3.102,0.406 3.1,0.391 3.1,0.375 3.1,-0.075
  Bottom Layer region: -3.1,-0.075 -2.6,-0.075 -2.6,-1.025 -4.2,-1.025 -4.226,-1.024 -4.252,-1.022 -4.278,-1.019 -4.304,-1.014 -4.329,-1.008 -4.355,-1.001 -4.379,-0.992 -4.403,-0.982 -4.427,-0.971 -4.45,-0.958 -4.472,-0.944 -4.494,-0.93 -4.515,-0.914 -4.535,-0.897 -4.554,-0.879 -4.572,-0.86 -4.589,-0.84 -4.605,-0.819 -4.619,-0.797 -4.633,-0.775 -4.645,-0.752 -4.657,-0.728 -4.667,-0.704 -4.676,-0.68 -4.683,-0.654 -4.689,-0.629 -4.694,-0.603 -4.697,-0.577 -4.699,-0.551 -4.7,-0.525 -4.7,-0.075 -3.925,-0.075 -3.925,-0.55 -3.925,-0.564 -3.923,-0.579 -3.922,-0.593 -3.919,-0.607 -3.916,-0.621 -3.912,-0.635 -3.907,-0.649 -3.901,-0.662 -3.895,-0.675 -3.888,-0.687 -3.881,-0.7 -3.872,-0.712 -3.864,-0.723 -3.854,-0.734 -3.844,-0.744 -3.834,-0.754 -3.823,-0.764 -3.812,-0.772 -3.8,-0.781 -3.788,-0.788 -3.775,-0.795 -3.762,-0.801 -3.749,-0.807 -3.735,-0.812 -3.721,-0.816 -3.707,-0.819 -3.693,-0.822 -3.679,-0.823 -3.664,-0.825 -3.65,-0.825 -3.4,-0.825 -3.384,-0.825 -3.369,-0.823 -3.353,-0.821 -3.338,-0.818 -3.322,-0.815 -3.307,-0.81 -3.292,-0.805 -3.278,-0.799 -3.264,-0.792 -3.25,-0.785 -3.237,-0.777 -3.224,-0.768 -3.211,-0.758 -3.199,-0.748 -3.188,-0.737 -3.177,-0.726 -3.167,-0.714 -3.157,-0.701 -3.148,-0.688 -3.14,-0.675 -3.133,-0.661 -3.126,-0.647 -3.12,-0.633 -3.115,-0.618 -3.11,-0.603 -3.107,-0.587 -3.104,-0.572 -3.102,-0.556 -3.1,-0.541 -3.1,-0.525 -3.1,-0.075
  Bottom Layer region: 2.6,-1.025 4.2,-1.025 4.226,-1.024 4.252,-1.022 4.278,-1.019 4.304,-1.014 4.329,-1.008 4.355,-1.001 4.379,-0.992 4.403,-0.982 4.427,-0.971 4.45,-0.958 4.472,-0.944 4.494,-0.93 4.515,-0.914 4.535,-0.897 4.554,-0.879 4.572,-0.86 4.589,-0.84 4.605,-0.819 4.619,-0.797 4.633,-0.775 4.645,-0.752 4.657,-0.728 4.667,-0.704 4.676,-0.68 4.683,-0.654 4.689,-0.629 4.694,-0.603 4.697,-0.577 4.699,-0.551 4.7,-0.525 4.7,-0.075 3.925,-0.075 3.925,-0.525 3.925,-0.541 3.923,-0.556 3.921,-0.572 3.918,-0.587 3.915,-0.603 3.91,-0.618 3.905,-0.633 3.899,-0.647 3.892,-0.661 3.885,-0.675 3.877,-0.688 3.868,-0.701 3.858,-0.714 3.848,-0.726 3.837,-0.737 3.826,-0.748 3.814,-0.758 3.801,-0.768 3.788,-0.777 3.775,-0.785 3.761,-0.792 3.747,-0.799 3.733,-0.805 3.718,-0.81 3.703,-0.815 3.687,-0.818 3.672,-0.821 3.656,-0.823 3.641,-0.825 3.625,-0.825 3.4,-0.825 3.384,-0.825 3.369,-0.823 3.353,-0.821 3.338,-0.818 3.322,-0.815 3.307,-0.81 3.292,-0.805 3.278,-0.799 3.264,-0.792 3.25,-0.785 3.237,-0.777 3.224,-0.768 3.211,-0.758 3.199,-0.748 3.188,-0.737 3.177,-0.726 3.167,-0.714 3.157,-0.701 3.148,-0.688 3.14,-0.675 3.133,-0.661 3.126,-0.647 3.12,-0.633 3.115,-0.618 3.11,-0.603 3.107,-0.587 3.104,-0.572 3.102,-0.556 3.1,-0.541 3.1,-0.525 3.1,-0.075 2.6,-0.075 2.6,-1.025
  Bottom Layer region: -2.6,0.875 -4.2,0.875 -4.226,0.874 -4.252,0.872 -4.278,0.869 -4.304,0.864 -4.329,0.858 -4.355,0.851 -4.379,0.842 -4.403,0.832 -4.427,0.821 -4.45,0.808 -4.472,0.794 -4.494,0.78 -4.515,0.764 -4.535,0.747 -4.554,0.729 -4.572,0.71 -4.589,0.69 -4.605,0.669 -4.619,0.647 -4.633,0.625 -4.645,0.602 -4.657,0.578 -4.667,0.554 -4.676,0.53 -4.683,0.504 -4.689,0.479 -4.694,0.453 -4.697,0.427 -4.699,0.401 -4.7,0.375 -4.7,-0.075 -3.925,-0.075 -3.925,0.375 -3.925,0.391 -3.923,0.406 -3.921,0.422 -3.918,0.437 -3.915,0.453 -3.91,0.468 -3.905,0.483 -3.899,0.497 -3.892,0.511 -3.885,0.525 -3.877,0.538 -3.868,0.551 -3.858,0.564 -3.848,0.576 -3.837,0.587 -3.826,0.598 -3.814,0.608 -3.801,0.618 -3.788,0.627 -3.775,0.635 -3.761,0.642 -3.747,0.649 -3.733,0.655 -3.718,0.66 -3.703,0.665 -3.687,0.668 -3.672,0.671 -3.656,0.673 -3.641,0.675 -3.625,0.675 -3.4,0.675 -3.384,0.675 -3.369,0.673 -3.353,0.671 -3.338,0.668 -3.322,0.665 -3.307,0.66 -3.292,0.655 -3.278,0.649 -3.264,0.642 -3.25,0.635 -3.237,0.627 -3.224,0.618 -3.211,0.608 -3.199,0.598 -3.188,0.587 -3.177,0.576 -3.167,0.564 -3.157,0.551 -3.148,0.538 -3.14,0.525 -3.133,0.511 -3.126,0.497 -3.12,0.483 -3.115,0.468 -3.11,0.453 -3.107,0.437 -3.104,0.422 -3.102,0.406 -3.1,0.391 -3.1,0.375 -3.1,-0.075 -2.6,-0.075 -2.6,0.875
  Bottom Layer region: 2.425,2.5 2.425,2.3 2.398,2.301 2.37,2.303 2.343,2.306 2.316,2.311 2.289,2.318 2.263,2.326 2.237,2.335 2.211,2.345 2.187,2.357 2.163,2.37 2.139,2.385 2.116,2.4 2.095,2.417 2.074,2.435 2.054,2.454 2.035,2.474 2.017,2.495 2,2.516 1.985,2.539 1.97,2.562 1.957,2.587 1.945,2.611 1.935,2.637 1.926,2.663 1.918,2.689 1.911,2.716 1.906,2.743 1.903,2.77 1.901,2.798 1.9,2.825 1.9,3.025 1.901,3.052 1.903,3.08 1.906,3.107 1.911,3.134 1.918,3.161 1.926,3.187 1.935,3.213 1.945,3.239 1.957,3.263 1.97,3.287 1.985,3.311 2,3.334 2.017,3.355 2.035,3.376 2.054,3.396 2.074,3.415 2.095,3.433 2.116,3.45 2.139,3.465 2.163,3.48 2.187,3.493 2.211,3.505 2.237,3.515 2.263,3.524 2.289,3.532 2.316,3.539 2.343,3.544 2.37,3.547 2.398,3.549 2.425,3.55 2.425,3.35 2.408,3.35 2.391,3.348 2.374,3.346 2.357,3.343 2.341,3.339 2.325,3.334 2.309,3.328 2.293,3.322 2.277,3.315 2.262,3.306 2.248,3.298 2.234,3.288 2.22,3.278 2.208,3.267 2.195,3.255 2.183,3.242 2.172,3.23 2.162,3.216 2.152,3.202 2.144,3.187 2.135,3.173 2.128,3.157 2.122,3.141 2.116,3.125 2.111,3.109 2.107,3.093 2.104,3.076 2.102,3.059 2.1,3.042 2.1,3.025 2.1,2.825 2.1,2.808 2.102,2.791 2.104,2.774 2.107,2.757 2.111,2.741 2.116,2.725 2.122,2.709 2.128,2.693 2.135,2.677 2.144,2.662 2.152,2.648 2.162,2.634 2.172,2.62 2.183,2.608 2.195,2.595 2.208,2.583 2.22,2.572 2.234,2.562 2.248,2.552 2.262,2.544 2.277,2.535 2.293,2.528 2.309,2.522 2.325,2.516 2.341,2.511 2.357,2.507 2.374,2.504 2.391,2.502 2.408,2.5 2.425,2.5
  Bottom Layer region: 2.425,3.35 2.425,3.55 2.452,3.549 2.48,3.547 2.507,3.544 2.534,3.539 2.561,3.532 2.587,3.524 2.613,3.515 2.639,3.505 2.663,3.493 2.688,3.48 2.711,3.465 2.734,3.45 2.755,3.433 2.776,3.415 2.796,3.396 2.815,3.376 2.833,3.355 2.85,3.334 2.865,3.311 2.88,3.287 2.893,3.263 2.905,3.239 2.915,3.213 2.924,3.187 2.932,3.161 2.939,3.134 2.944,3.107 2.947,3.08 2.949,3.052 2.95,3.025 2.95,2.825 2.949,2.798 2.947,2.77 2.944,2.743 2.939,2.716 2.932,2.689 2.924,2.663 2.915,2.637 2.905,2.611 2.893,2.587 2.88,2.562 2.865,2.539 2.85,2.516 2.833,2.495 2.815,2.474 2.796,2.454 2.776,2.435 2.755,2.417 2.734,2.4 2.711,2.385 2.688,2.37 2.663,2.357 2.639,2.345 2.613,2.335 2.587,2.326 2.561,2.318 2.534,2.311 2.507,2.306 2.48,2.303 2.452,2.301 2.425,2.3 2.425,2.5 2.442,2.5 2.459,2.502 2.476,2.504 2.493,2.507 2.509,2.511 2.525,2.516 2.541,2.522 2.557,2.528 2.573,2.535 2.588,2.544 2.602,2.552 2.616,2.562 2.63,2.572 2.642,2.583 2.655,2.595 2.667,2.608 2.678,2.62 2.688,2.634 2.698,2.648 2.706,2.662 2.715,2.677 2.722,2.693 2.728,2.709 2.734,2.725 2.739,2.741 2.743,2.757 2.746,2.774 2.748,2.791 2.75,2.808 2.75,2.825 2.75,3.025 2.75,3.042 2.748,3.059 2.746,3.076 2.743,3.093 2.739,3.109 2.734,3.125 2.728,3.141 2.722,3.157 2.715,3.173 2.706,3.187 2.698,3.202 2.688,3.216 2.678,3.23 2.667,3.242 2.655,3.255 2.642,3.267 2.63,3.278 2.616,3.288 2.602,3.298 2.588,3.306 2.573,3.315 2.557,3.322 2.541,3.328 2.525,3.334 2.509,3.339 2.493,3.343 2.476,3.346 2.459,3.348 2.442,3.35 2.425,3.35
  Bottom Layer region: -2.425,2.5 -2.425,2.3 -2.452,2.301 -2.48,2.303 -2.507,2.306 -2.534,2.311 -2.561,2.318 -2.587,2.326 -2.613,2.335 -2.639,2.345 -2.663,2.357 -2.688,2.37 -2.711,2.385 -2.734,2.4 -2.755,2.417 -2.776,2.435 -2.796,2.454 -2.815,2.474 -2.833,2.495 -2.85,2.516 -2.865,2.539 -2.88,2.562 -2.893,2.587 -2.905,2.611 -2.915,2.637 -2.924,2.663 -2.932,2.689 -2.939,2.716 -2.944,2.743 -2.947,2.77 -2.949,2.798 -2.95,2.825 -2.95,3.025 -2.949,3.052 -2.947,3.08 -2.944,3.107 -2.939,3.134 -2.932,3.161 -2.924,3.187 -2.915,3.213 -2.905,3.239 -2.893,3.263 -2.88,3.287 -2.865,3.311 -2.85,3.334 -2.833,3.355 -2.815,3.376 -2.796,3.396 -2.776,3.415 -2.755,3.433 -2.734,3.45 -2.711,3.465 -2.688,3.48 -2.663,3.493 -2.639,3.505 -2.613,3.515 -2.587,3.524 -2.561,3.532 -2.534,3.539 -2.507,3.544 -2.48,3.547 -2.452,3.549 -2.425,3.55 -2.425,3.35 -2.442,3.35 -2.459,3.348 -2.476,3.346 -2.493,3.343 -2.509,3.339 -2.525,3.334 -2.541,3.328 -2.557,3.322 -2.573,3.315 -2.588,3.306 -2.602,3.298 -2.616,3.288 -2.63,3.278 -2.642,3.267 -2.655,3.255 -2.667,3.242 -2.678,3.23 -2.688,3.216 -2.698,3.202 -2.706,3.187 -2.715,3.173 -2.722,3.157 -2.728,3.141 -2.734,3.125 -2.739,3.109 -2.743,3.093 -2.746,3.076 -2.748,3.059 -2.75,3.042 -2.75,3.025 -2.75,2.825 -2.75,2.808 -2.748,2.791 -2.746,2.774 -2.743,2.757 -2.739,2.741 -2.734,2.725 -2.728,2.709 -2.722,2.693 -2.715,2.677 -2.706,2.662 -2.698,2.648 -2.688,2.634 -2.678,2.62 -2.667,2.608 -2.655,2.595 -2.642,2.583 -2.63,2.572 -2.616,2.562 -2.602,2.552 -2.588,2.544 -2.573,2.535 -2.557,2.528 -2.541,2.522 -2.525,2.516 -2.509,2.511 -2.493,2.507 -2.476,2.504 -2.459,2.502 -2.442,2.5 -2.425,2.5
  Bottom Layer region: -2.425,3.35 -2.425,3.55 -2.398,3.549 -2.37,3.547 -2.343,3.544 -2.316,3.539 -2.289,3.532 -2.263,3.524 -2.237,3.515 -2.211,3.505 -2.187,3.493 -2.163,3.48 -2.139,3.465 -2.116,3.45 -2.095,3.433 -2.074,3.415 -2.054,3.396 -2.035,3.376 -2.017,3.355 -2,3.334 -1.985,3.311 -1.97,3.287 -1.957,3.263 -1.945,3.239 -1.935,3.213 -1.926,3.187 -1.918,3.161 -1.911,3.134 -1.906,3.107 -1.903,3.08 -1.901,3.052 -1.9,3.025 -1.9,2.825 -1.901,2.798 -1.903,2.77 -1.906,2.743 -1.911,2.716 -1.918,2.689 -1.926,2.663 -1.935,2.637 -1.945,2.611 -1.957,2.587 -1.97,2.562 -1.985,2.539 -2,2.516 -2.017,2.495 -2.035,2.474 -2.054,2.454 -2.074,2.435 -2.095,2.417 -2.116,2.4 -2.139,2.385 -2.163,2.37 -2.187,2.357 -2.211,2.345 -2.237,2.335 -2.263,2.326 -2.289,2.318 -2.316,2.311 -2.343,2.306 -2.37,2.303 -2.398,2.301 -2.425,2.3 -2.425,2.5 -2.408,2.5 -2.391,2.502 -2.374,2.504 -2.357,2.507 -2.341,2.511 -2.325,2.516 -2.309,2.522 -2.293,2.528 -2.277,2.535 -2.262,2.544 -2.248,2.552 -2.234,2.562 -2.22,2.572 -2.208,2.583 -2.195,2.595 -2.183,2.608 -2.172,2.62 -2.162,2.634 -2.152,2.648 -2.144,2.662 -2.135,2.677 -2.128,2.693 -2.122,2.709 -2.116,2.725 -2.111,2.741 -2.107,2.757 -2.104,2.774 -2.102,2.791 -2.1,2.808 -2.1,2.825 -2.1,3.025 -2.1,3.042 -2.102,3.059 -2.104,3.076 -2.107,3.093 -2.111,3.109 -2.116,3.125 -2.122,3.141 -2.128,3.157 -2.135,3.173 -2.144,3.187 -2.152,3.202 -2.162,3.216 -2.172,3.23 -2.183,3.242 -2.195,3.255 -2.208,3.267 -2.22,3.278 -2.234,3.288 -2.248,3.298 -2.262,3.306 -2.277,3.315 -2.293,3.322 -2.309,3.328 -2.325,3.334 -2.341,3.339 -2.357,3.343 -2.374,3.346 -2.391,3.348 -2.408,3.35 -2.425,3.35
  Internal Plane 13 circle w0.2: c-4.552,1.854 r0.1
  Internal Plane 13 circle w0.2: c-4.552,1.854 r0.1
  Internal Plane 13 lines w0.127: 4,-2.825 4,-1.525 4,-2.825 ; 4,-2.825 -4,-2.825 ; 4,-2.825 -4,-2.825 ; -4,-2.825 -4,-1.525 -4,-2.825 ; 3.75,-1.525 5.75,-1.525 3.75,-1.525 ; 3.75,-1.525 3.75,2.825 ; 3.75,-1.525 -3.75,-1.525 ; 3.75,-1.525 3.75,2.825 ; 3.75,-1.525 -3.75,-1.525 ; -3.75,-1.525 -5.75,-1.525 -3.75,-1.525 ; -3.75,-1.525 -3.75,2.825 ; -3.75,-1.525 -3.75,2.825 ; 3.75,2.825 -3.75,2.825 ; 3.75,2.825 -3.75,2.825
  silkscreen extent -4.65,-1.53 3.75,2.83, body extent -3.68,-2.79 3.68,2.79, height 1.85
*QFN50P300X300X100-17N [mil]
  rrect50% 32x12 smd mask+2: 1(-58,30) 2(-58,10) 3(-58,-10) 4(-58,-30) 9(58,-30) 10(58,-10) 11(58,10) 12(58,30)
  rrect50% 12x32 smd mask+2: 5(-30,-58) 6(-10,-58) 7(10,-58) 8(30,-58) 13(30,58) 14(10,58) 15(-10,58) 16(-30,58)
  rect 55x55 smd paste-50: 17(0,0)
  silkscreen extent -100,-62 62,62, body extent -59,-59 59,59, height 39
*QFN-16_0.5MM [mm]
  rrect50% 0.8x0.297 smd mask+0.051: 1(-1.275,1) 2(-1.275,0.5) 3(-1.275,0) 4(-1.275,-0.5) 5(-1.275,-1) 9(1.275,-1) 10(1.275,-0.5) 11(1.275,0) 12(1.275,0.5) 13(1.275,1)
  rrect50% 0.297x0.8 smd mask+0.051: 6(-0.5,-1.275) 7(0,-1.275) 8(0.5,-1.275) 14(0.5,1.275) 15(0,1.275) 16(-0.5,1.275)
  silkscreen extent -2.1,-1.5 1.5,1.5, body extent -1.37,-1.5 1.37,1.5, height 1
*SOP65P640X120-8N [mil]
  rect 58x14 smd mask+3: 1(-115,38)
  rrect50% 58x14 smd mask+3: 2(-115,13) 3(-115,-13) 4(-115,-38) 5(115,-38) 6(115,-13) 7(115,13) 8(115,38)
  silkscreen extent -89,-61 89,61, body extent -89,-59 89,59, height 47
*SW_PTS810_SJM_250_SMTR_LFS [mm]
  rect 1.05x0.65 smd: 1(-2.075,1.075) 2(2.075,1.075) 3(-2.075,-1.075) 4(2.075,-1.075)
  silkscreen extent -3.2,-1.62 2.1,1.62, body extent -2.1,-1.35 2.1,1.35, height 2.5
ESD_RS [mm] "ESD protector 3.3V"
  rect 1.25x1.1 smd: 1(-1.55,0) 2(1.55,0)
  silkscreen extent -2.12,-1 1.55,1, body extent -1.55,-1 1.55,1, height 1.1
ESD_USB [mm] "ESD protector 5V"
  rect 0.8x0.4 smd: 1(-0.65,0) 2(0.65,0)
  silkscreen extent -1,0.45 -0.9,0.55, body extent -0.63,-0.43 0.63,0.43, height 0.65
"Inductor 4U7H" [mm]
  rect 1x2.7 smd: 1(-1.3,0) 2(1.3,0)
  silkscreen extent -1.6,-1.8 1.6,1.8, body extent -1.6,-1.6 1.6,1.6, height 1.5
"Inductor 470NH" [mm]
  rect 1.85x3.4 smd: 1(-3.7,0) 2(3.7,0)
  silkscreen extent -4.7,-3.4 4.7,3.4, body extent -3.65,-3.4 3.65,3.4, height 3
QFN50P700X700X90_HS-49N_ [mm] "QFN, 48-Leads, Body 7.00x7.00mm, Pitch 0.50mm, Thermal Pad 5.75x5.75mm, IPC Medium Density"
  rect 4.318x4.318 smd paste-2.54: 0(0,0)
  rrect50% 0.847x0.254 smd mask+0.051: 1(-3.435,2.75) 2(-3.435,2.25) 3(-3.435,1.75) 4(-3.435,1.25) 5(-3.435,0.75) 6(-3.435,0.25) 7(-3.435,-0.25) 8(-3.435,-0.75) 9(-3.435,-1.25) 10(-3.435,-1.75) 11(-3.435,-2.25) 12(-3.435,-2.75) 25(3.435,-2.75) 26(3.435,-2.25) 27(3.435,-1.75) 28(3.435,-1.25) 29(3.435,-0.75) 30(3.435,-0.25) 31(3.435,0.25) 32(3.435,0.75) 33(3.435,1.25) 34(3.435,1.75) 35(3.435,2.25) 36(3.435,2.75)
  rrect50% 0.254x0.847 smd mask+0.051: 13(-2.75,-3.435) 14(-2.25,-3.435) 15(-1.75,-3.435) 16(-1.25,-3.435) 17(-0.75,-3.435) 18(-0.25,-3.435) 19(0.25,-3.435) 20(0.75,-3.435) 21(1.25,-3.435) 22(1.75,-3.435) 23(2.25,-3.435) 24(2.75,-3.435) 37(2.75,3.435) 38(2.25,3.435) 39(1.75,3.435) 40(1.25,3.435) 41(0.75,3.435) 42(0.25,3.435) 43(-0.25,3.435) 44(-0.75,3.435) 45(-1.25,3.435) 46(-1.75,3.435) 47(-2.25,3.435) 48(-2.75,3.435)
  silkscreen extent -4.52,-3.7 3.7,3.7, body extent -3.6,-3.52 3.5,3.58, height 0.9
SAMM8Q010 [mm]
  rect 1.8x1.5 smd mask+0.076: 1(-6.6,3.8) 2(-6.6,1.9) 3(-6.6,0) 4(-6.6,-1.9) 5(-6.6,-3.8) 11(6.6,-3.8) 12(6.6,-1.9) 13(6.6,0) 14(6.6,1.9) 15(6.6,3.8)
  rect 1.5x1.8 smd mask+0.076: 6(-3.8,-6.6) 7(-1.9,-6.6) 8(0,-6.6) 9(1.9,-6.6) 10(3.8,-6.6) 16(3.8,6.6) 17(1.9,6.6) 18(0,6.6) 19(-1.9,6.6) 20(-3.8,6.6)
  silkscreen extent -8.3,-7.75 7.75,7.75, body extent -7.75,-7.75 7.75,7.75, height 3.1
SON50P150X100_HS-9N [mm] "SON, 8-Leads, Body 2.00x1.50mm, Pitch 0.50mm, Thermal Pad 1.00x0.69mm, IPC Medium Density"
  rect 0.55x0.25 smd mask+0.051: 1(-0.675,0.75)
  rrect50% 0.55x0.25 smd mask+0.051: 2(-0.675,0.25) 3(-0.675,-0.25) 4(-0.675,-0.75) 5(0.675,-0.75) 6(0.675,-0.25) 7(0.675,0.25) 8(0.675,0.75)
  silkscreen extent -1.25,-1.2 0.8,1.25, body extent -0.8,-1.05 0.8,1.05, height 1
XB24CAPIT-001 [mm]
  round 1.1 hole 0.71: 1(-11,-0.525) 2(-11,-2.525) 3(-11,-4.525) 4(-11,-6.525) 5(-11,-8.525) 6(-11,-10.525) 7(-11,-12.525) 8(-11,-14.525) 9(-11,-16.525) 10(-11,-18.525) 11(11,-18.525) 12(11,-16.525) 13(11,-14.525) 14(11,-12.525) 15(11,-10.525) 16(11,-8.525) 17(11,-6.525) 18(11,-4.525) 19(11,-2.525) 20(11,-0.525)
  silkscreen extent -12.2,-21.13 12.19,2.54, body extent -12.19,-26.49 12.19,6.5, height 6.73